# Altium PCB LPCB218R0.PcbDoc (part 1 of 3)
Units mm, origin at the board's own origin, x right, y up, seen from the top; angles counter-clockwise.
Board outline 259.35 x 183.7 mm, 4 copper layers (Top Layer, Internal Plane 1, Mid-Layer 1, Bottom Layer); 193 components, 208 nets, 896 pads, 205 vias.
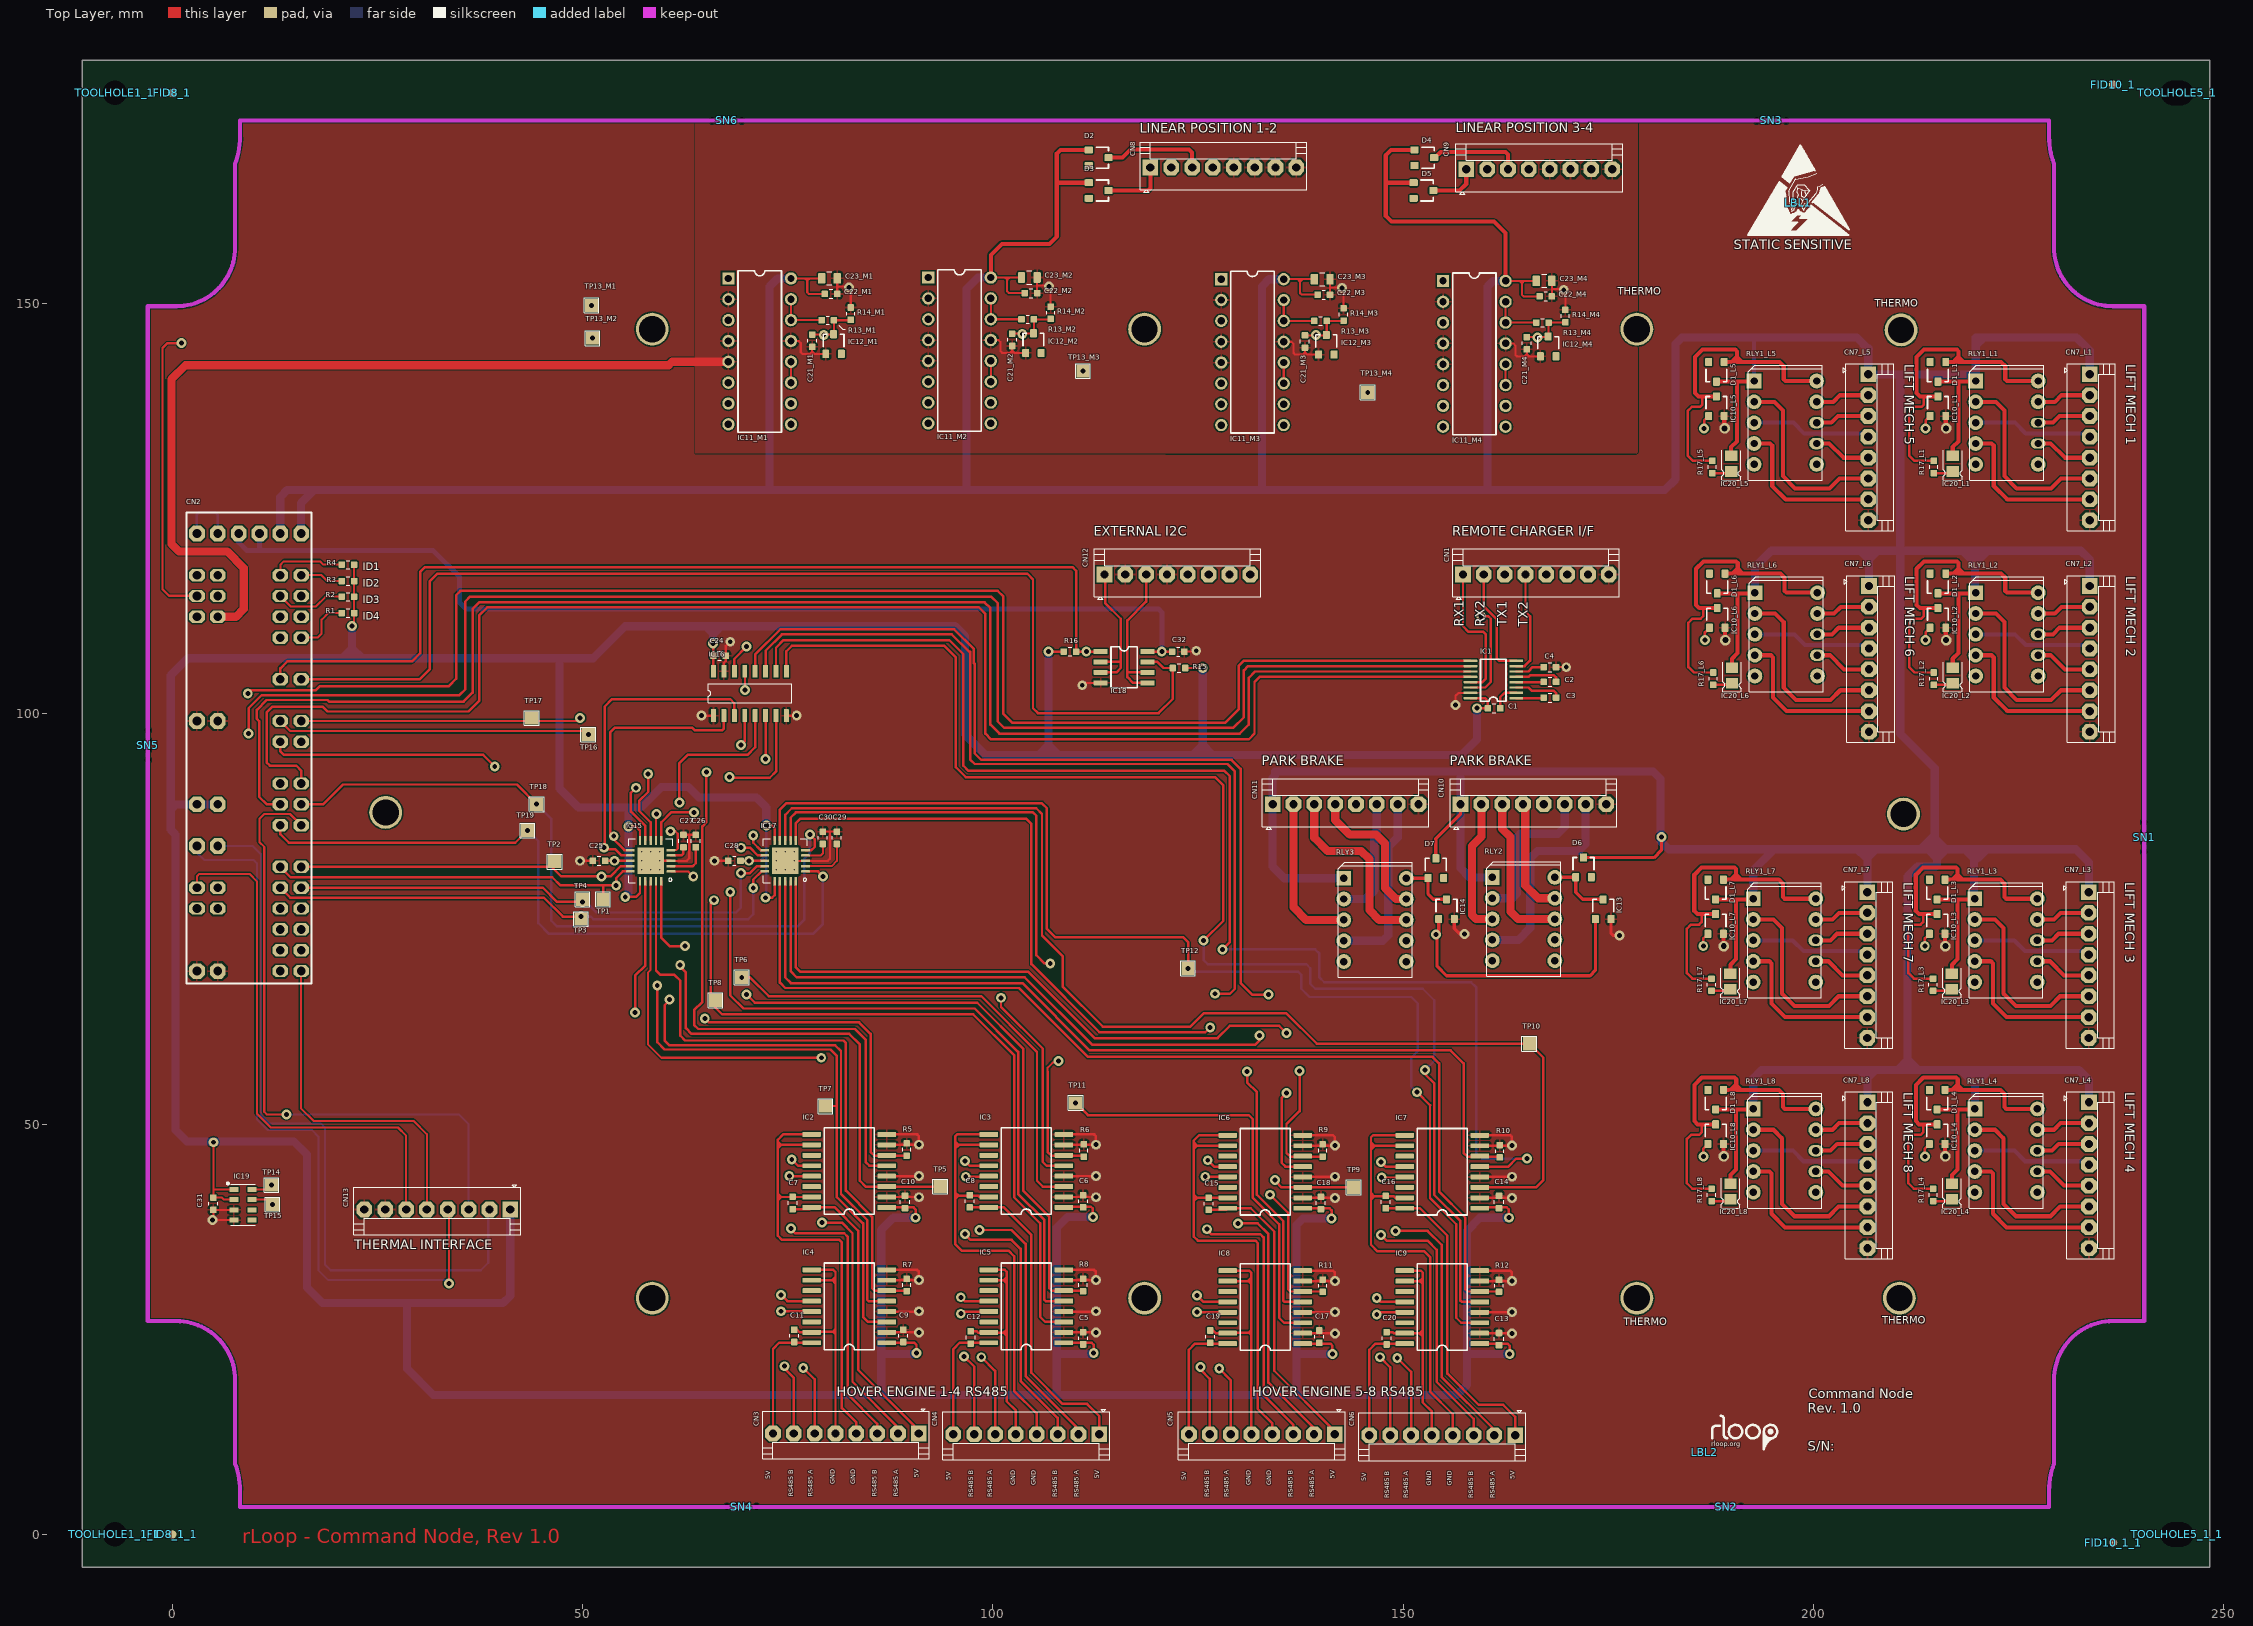
[diagram p0: Top Layer view]
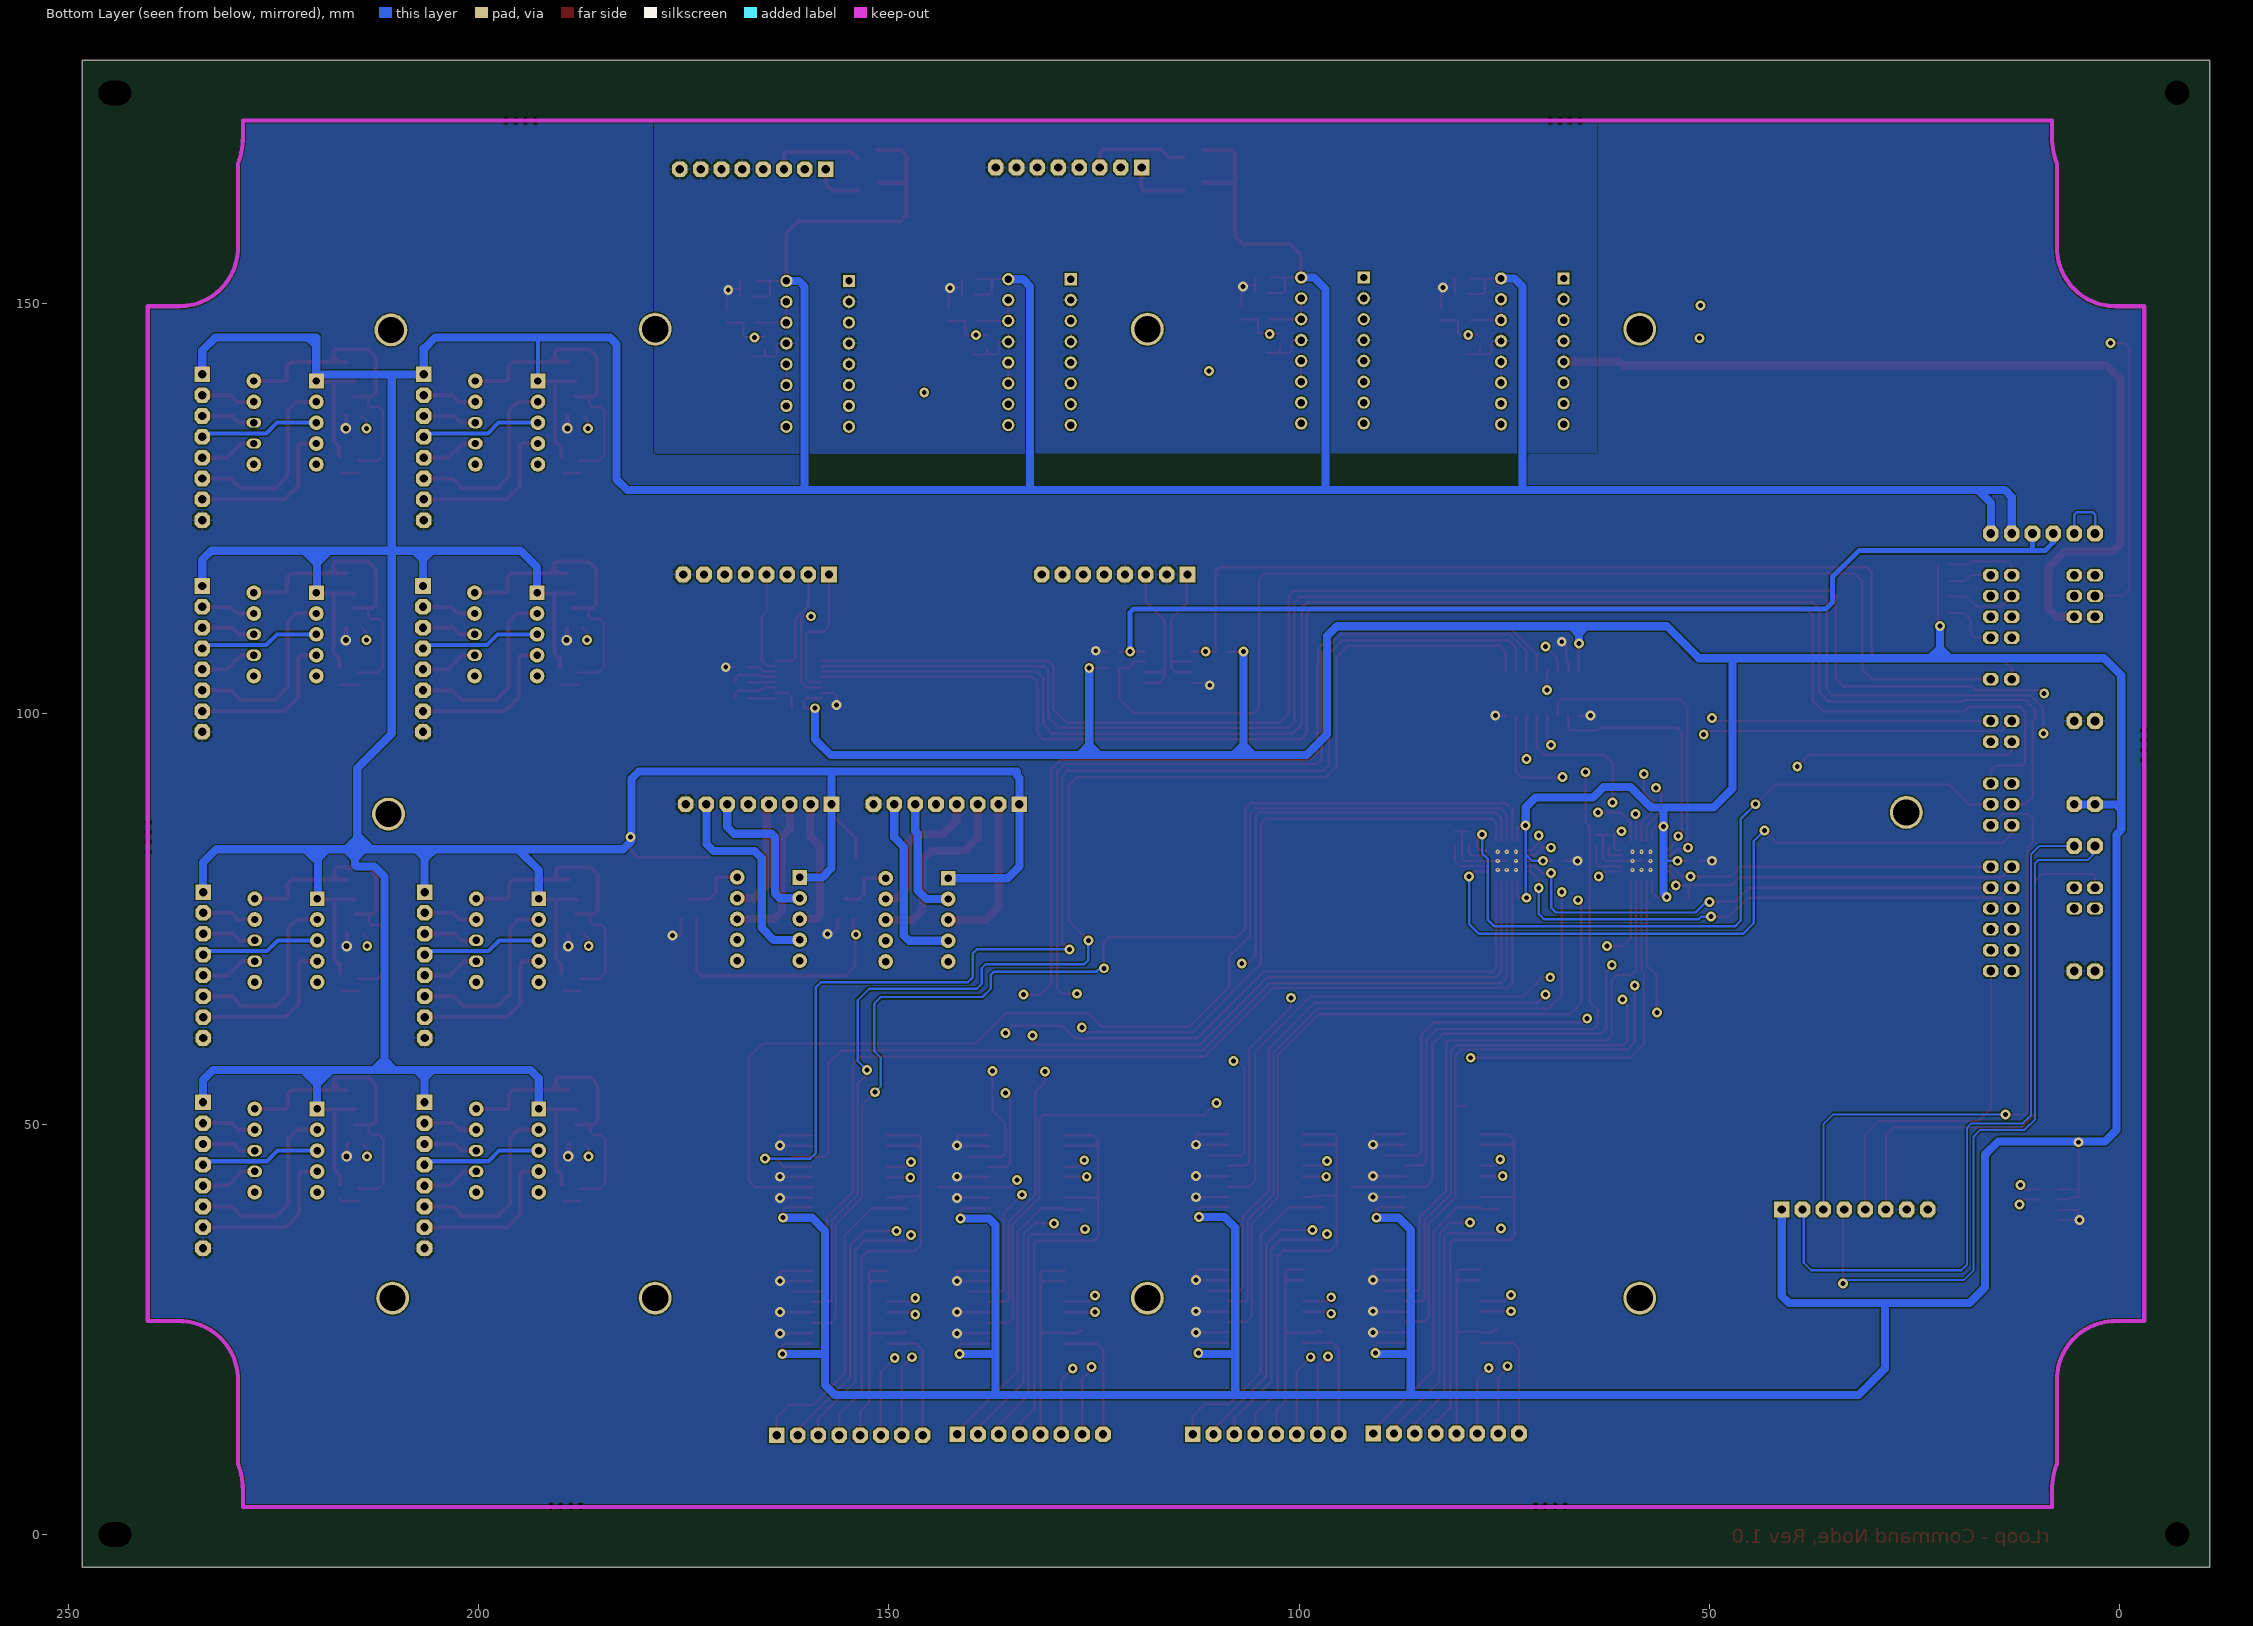
[diagram p1: Bottom Layer view, seen from below]
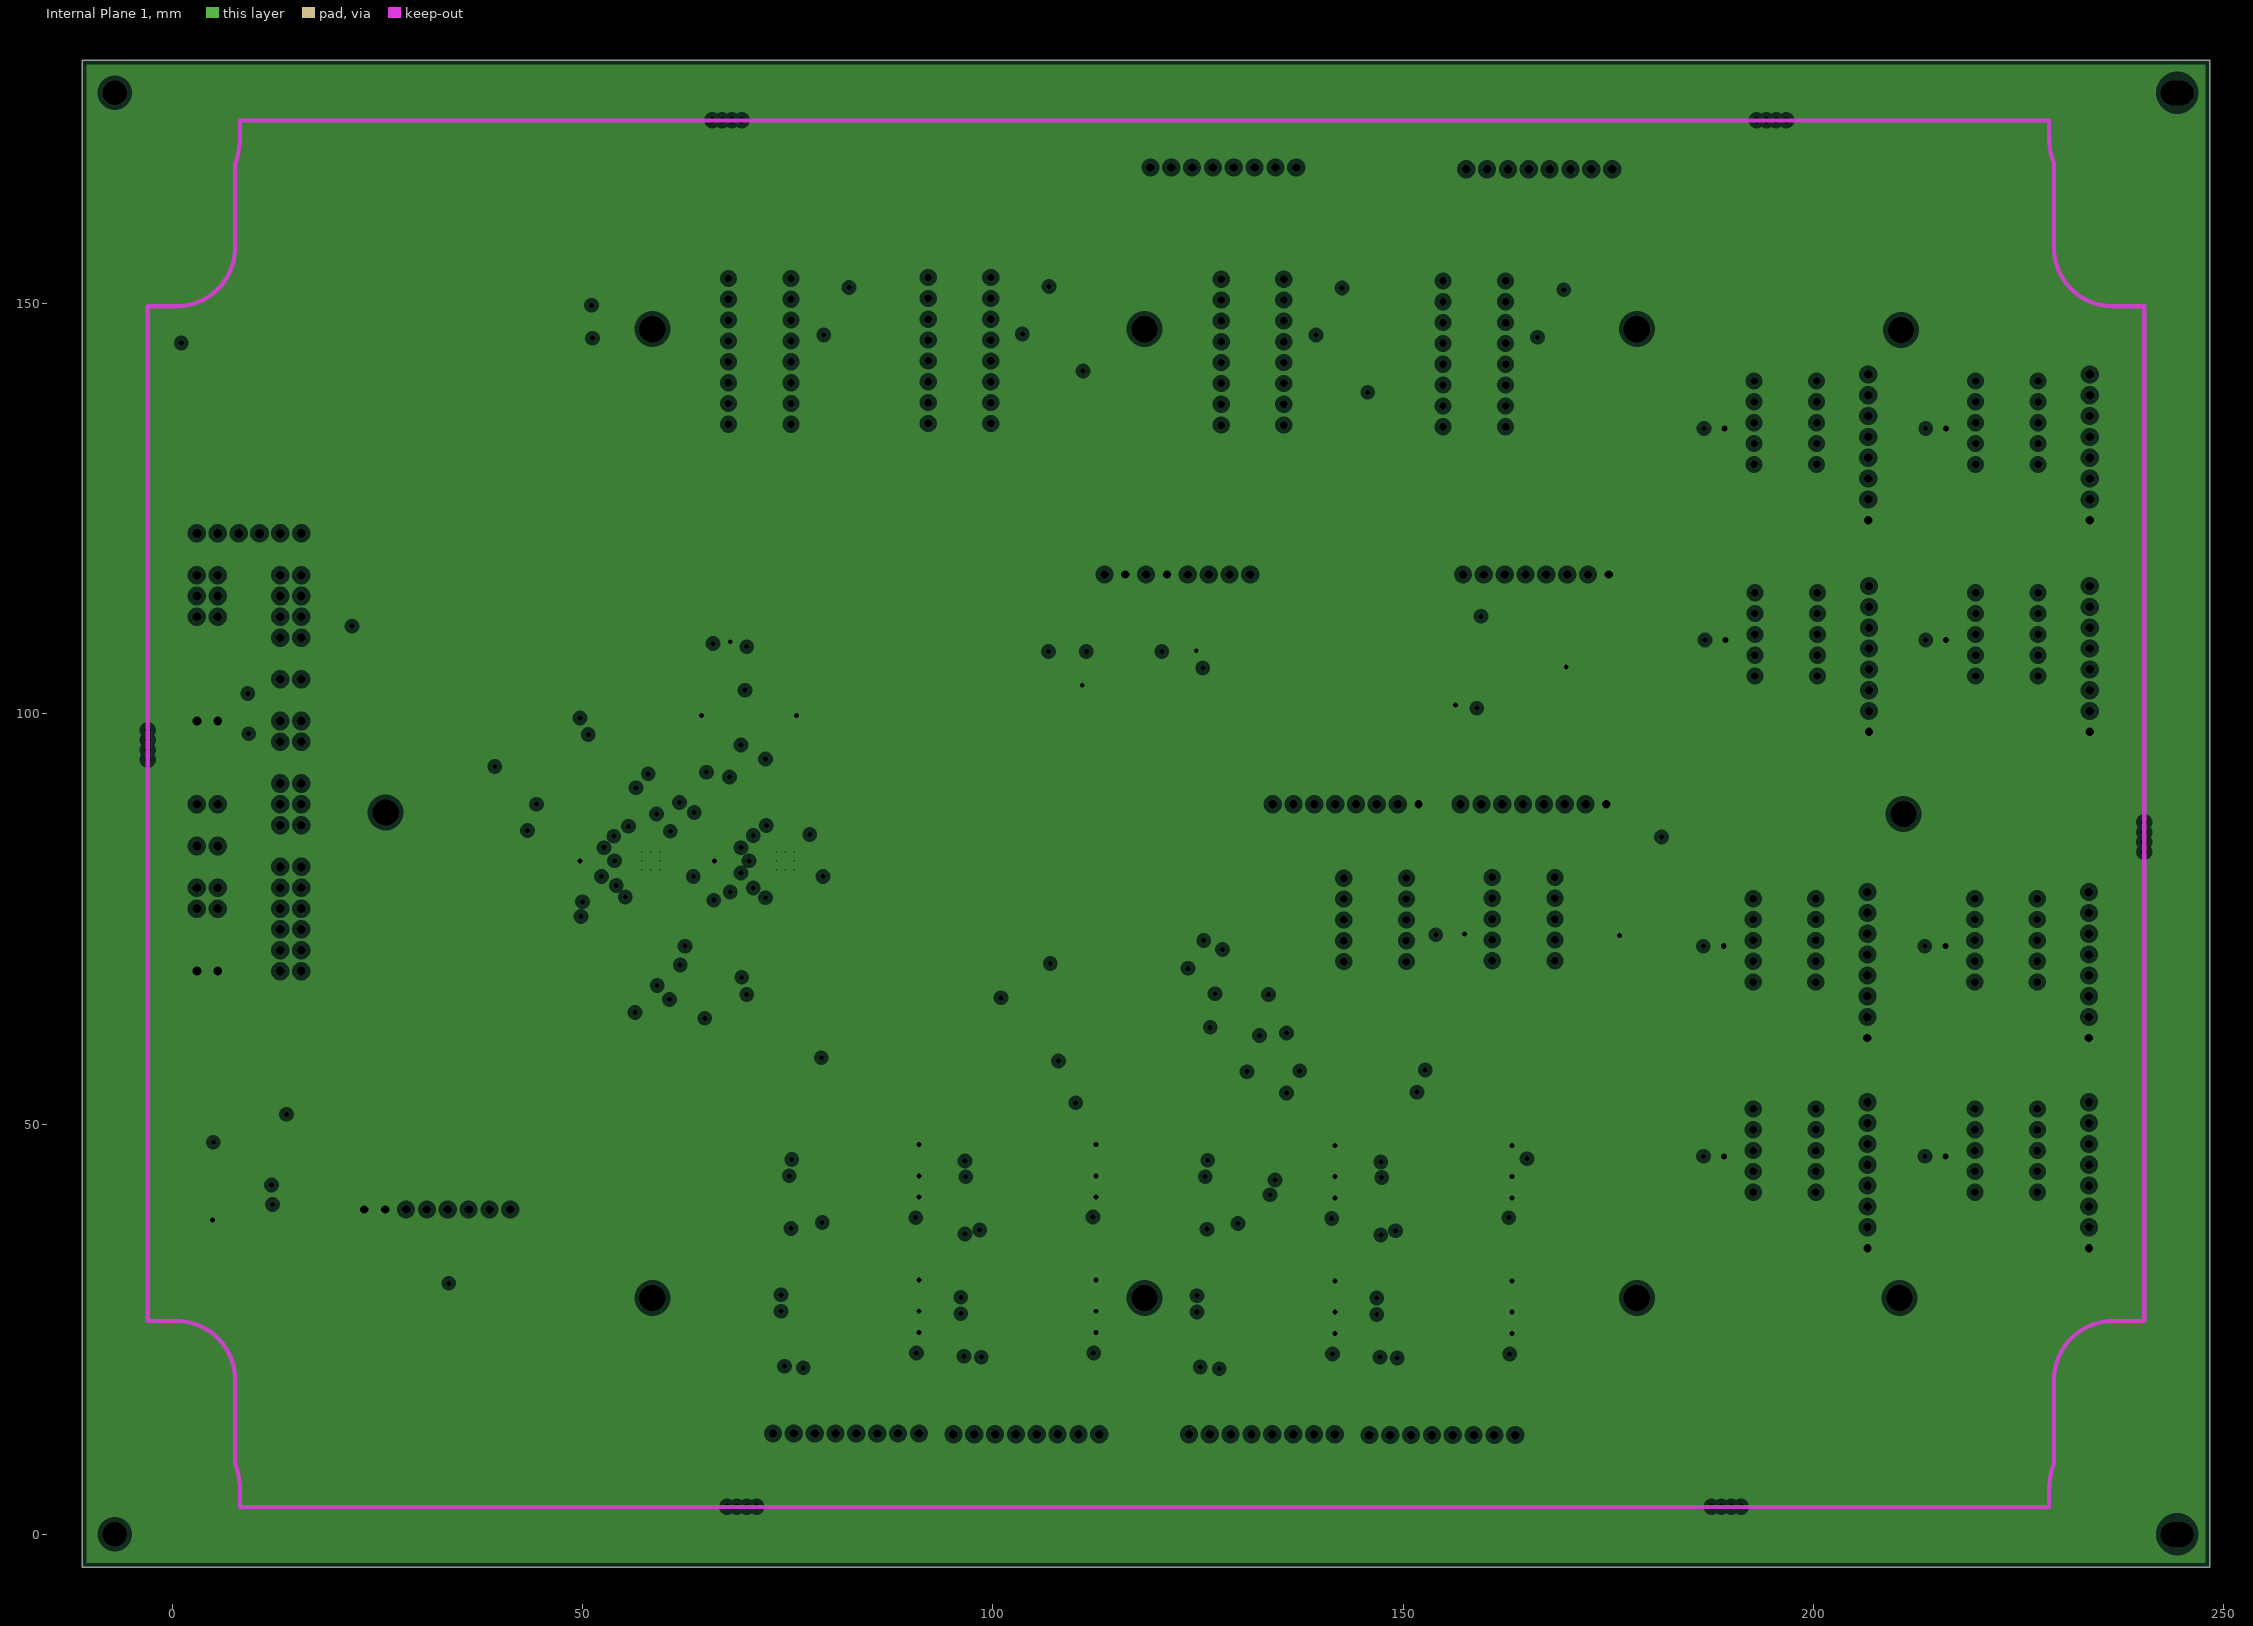
[diagram p2: Internal Plane 1, clearances drawn from the general rule]
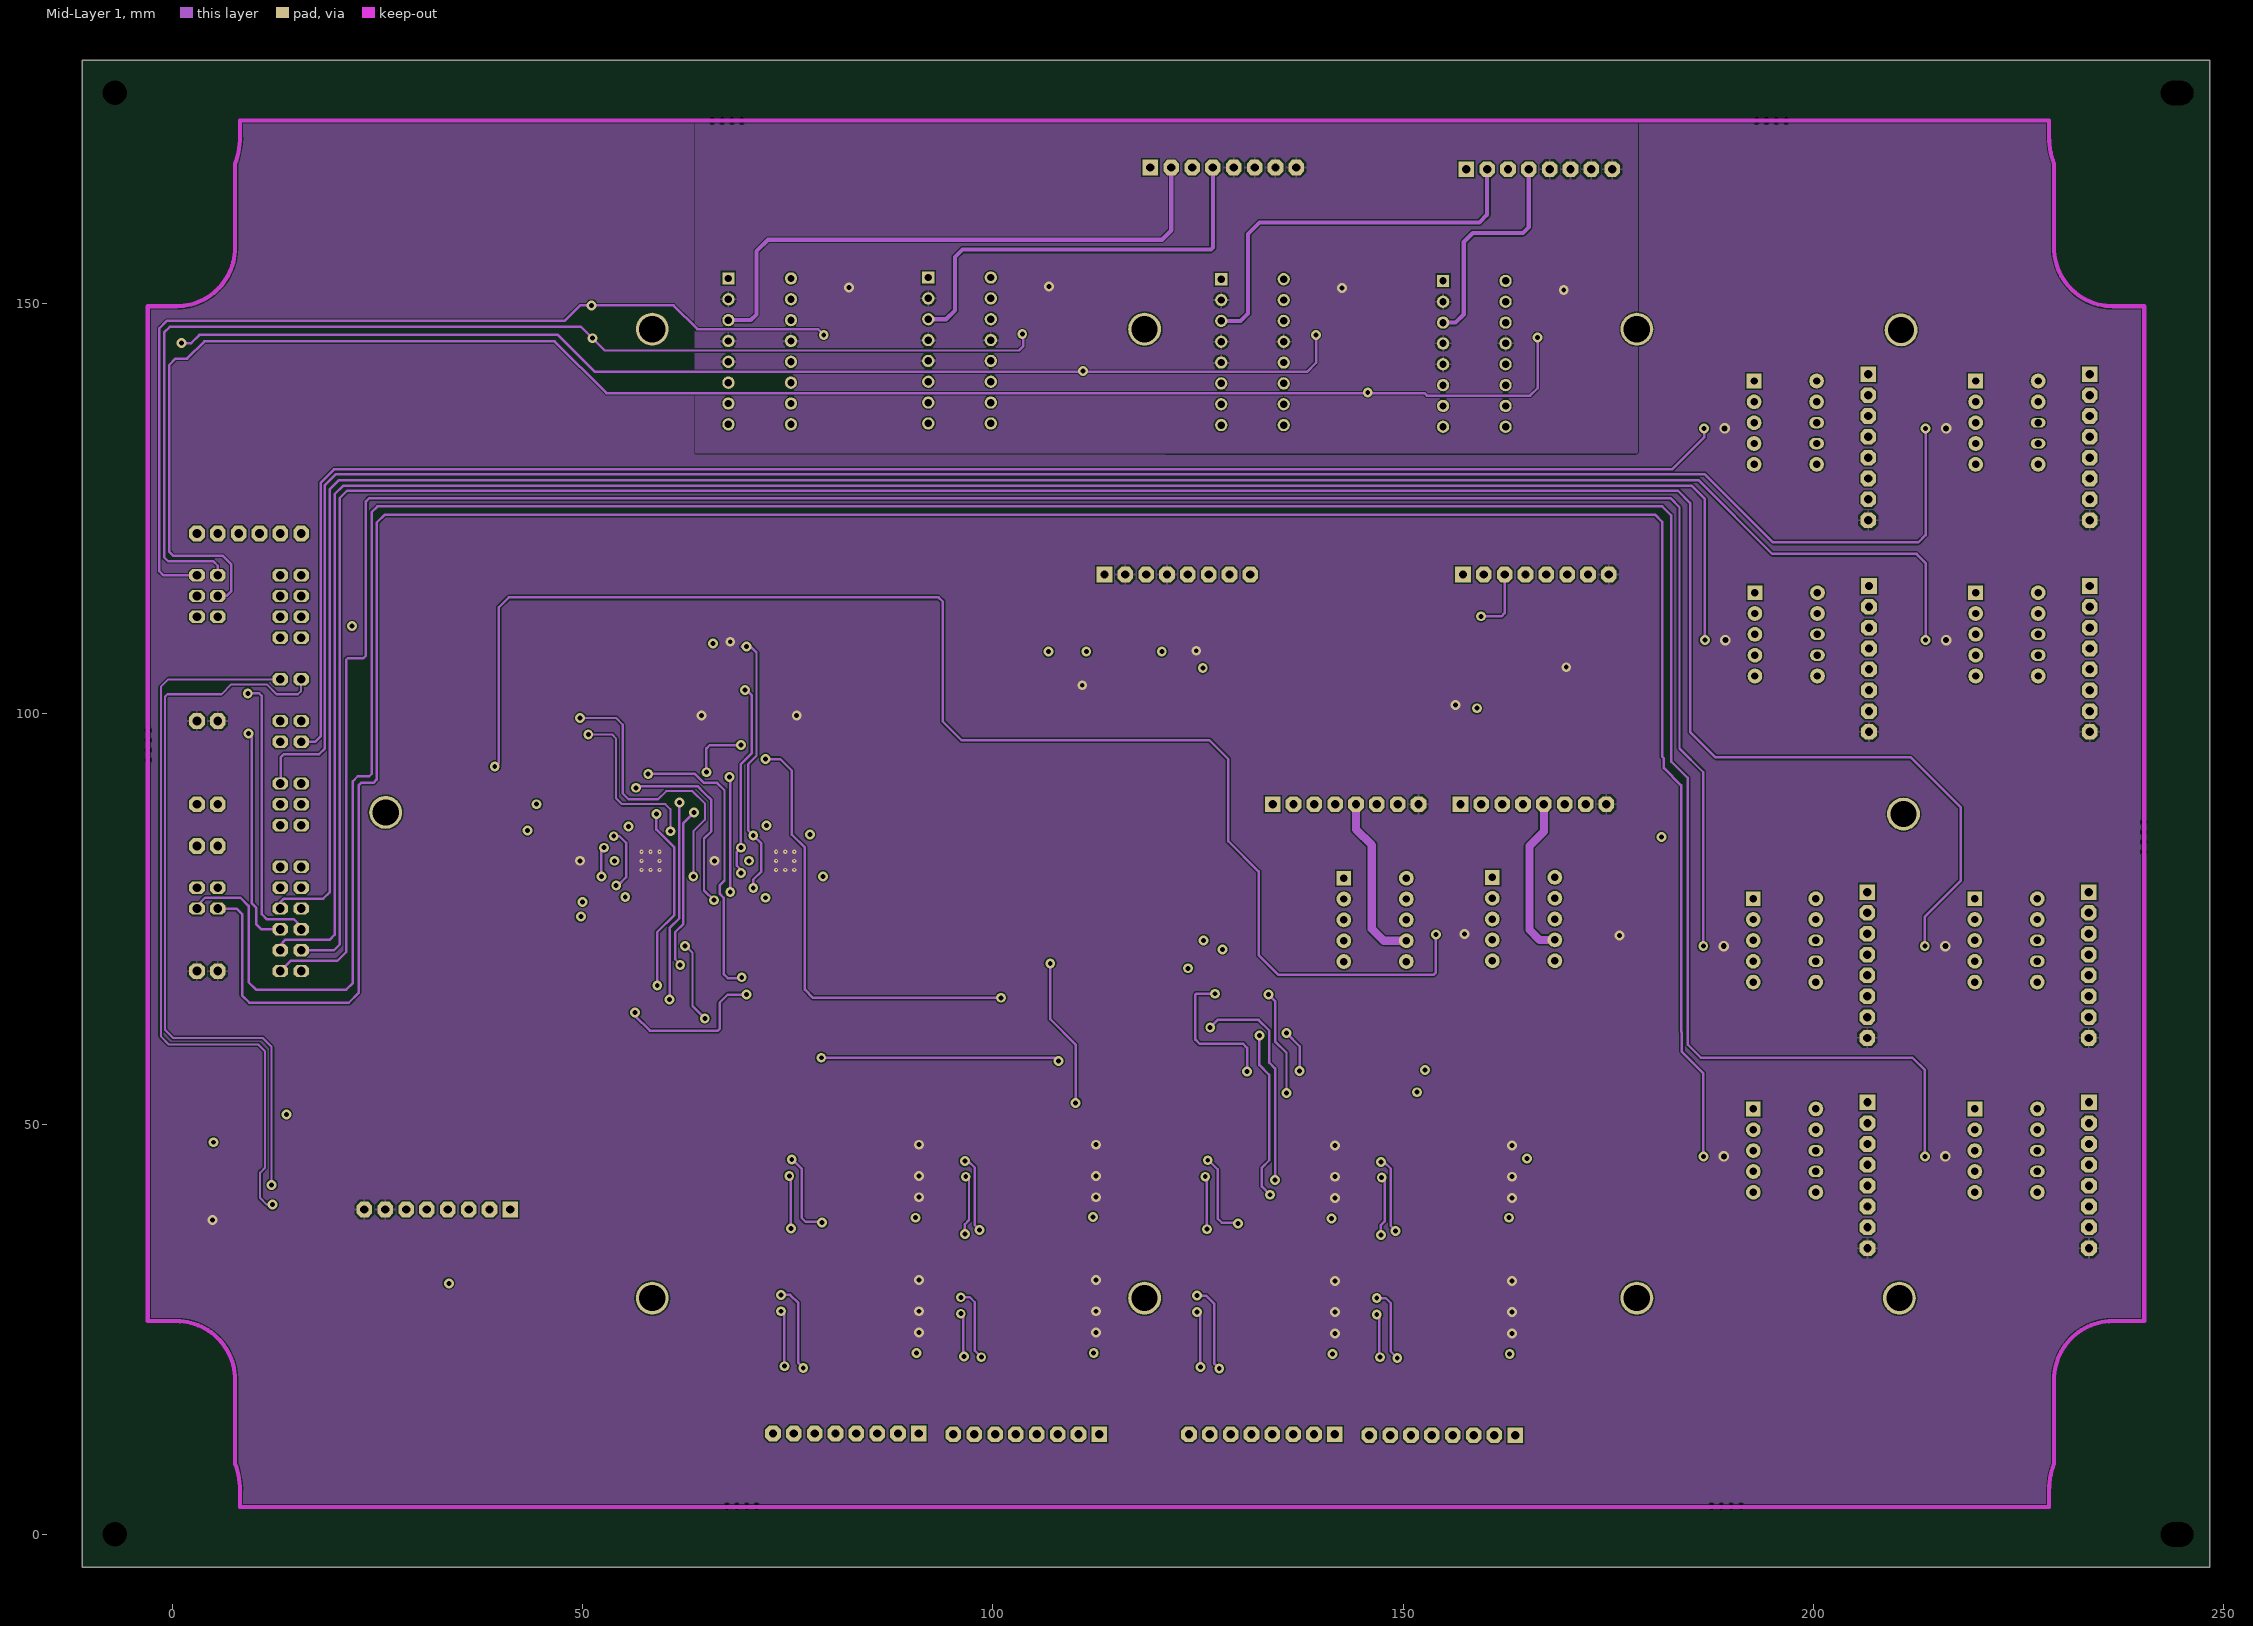
[diagram p3: Mid-Layer 1]

## Layer stack, top to bottom
Top Layer: signal copper 0.0356
Dielectric: core 0.32, FR-4, Dk 4.8
Internal Plane 1: plane copper 0.0356, net DGND
Dielectric: prepreg 0.32, FR-4, Dk 4.8
Mid-Layer 1: signal copper 0.0356
Dielectric: core 0.32, FR-4, Dk 4.8
Bottom Layer: signal copper 0.0356

## Board outline
-11,-4 248.348,-4 248.348,179.695 -11,179.695

## Design rules (kind name [scope] priority, off if disabled: settings)
Clearance [All] p1: gap=0.16
HoleSize [All] p1: absolutevalues=TRUE maxlimit=5 minlimit=0.025 maxpercent=80.000 minpercent=20.000
MinimumSolderMaskSliver [All] p1 off: minsoldermaskwidth=0.1
PlaneClearance [All] p1: clearance=0.6
PlaneConnect [All] p1: planeconnectstyle=Relief reliefexpansion=0.508 reliefentries=4 reliefconductorwidth=0.254 reliefairgap=0.254
PolygonConnect [IsVia] p1: connectstyle=Direct reliefconductorwidth=0.254 reliefentries=4 polygonreliefangle="90 Angle" airgapwidth=0.254
PolygonConnect PolygonConnect_1 [All] p2: connectstyle=Relief reliefconductorwidth=0.254 reliefentries=4 polygonreliefangle="90 Angle" airgapwidth=0.254
RoomDefinition "LPCB218 - OVERVIEW" [InComponentClass('LPCB218 - OVERVIEW')] p1: confinementstyle=ConfineIn formatcopy=TRUE lockcomponents=FALSE outline -79.611,-108.179 -28.811,-108.179 -28.811,-82.779 -79.611,-82.779
RoomDefinition "U_LPCB218 - CORE INTERFACE" [InComponentClass('U_LPCB218 - CORE INTERFACE')] p2: confinementstyle=ConfineIn formatcopy=TRUE lockcomponents=FALSE outline 1,57.6 33.7,57.6 33.7,118.1 1,118.1
RoomDefinition "U_LPCB218 - RS485 MUX CONTROL" [InComponentClass('U_LPCB218 - RS485 MUX CONTROL')] p3: confinementstyle=ConfineIn formatcopy=TRUE lockcomponents=FALSE outline -79.611,-108.179 -28.811,-108.179 -28.811,-82.779 -79.611,-82.779
RoomDefinition "U_LPCB218 - INTERNAL PRESSURE" [InComponentClass('U_LPCB218 - INTERNAL PRESSURE')] p4: confinementstyle=ConfineIn formatcopy=TRUE lockcomponents=FALSE outline 1,36.975 12.3,36.975 12.3,45.975 1,45.975
RoomDefinition "U_LPCB218 - EXTERNAL I2C" [InComponentClass('U_LPCB218 - EXTERNAL I2C')] p5: confinementstyle=ConfineIn formatcopy=TRUE lockcomponents=FALSE outline 101.295,96.25 133.195,96.25 133.195,119.65 101.295,119.65
RoomDefinition L8 [InComponentClass('L8')] p6: confinementstyle=ConfineIn formatcopy=TRUE lockcomponents=FALSE outline 183.91,32.48 210.91,32.48 210.91,57.88 183.91,57.88
RoomDefinition L7 [InComponentClass('L7')] p7: confinementstyle=ConfineIn formatcopy=TRUE lockcomponents=FALSE outline 183.9,58.1 210.9,58.1 210.9,83.5 183.9,83.5
RoomDefinition L6 [InComponentClass('L6')] p8: confinementstyle=ConfineIn formatcopy=TRUE lockcomponents=FALSE outline 184.1,95.4 211.1,95.4 211.1,120.8 184.1,120.8
RoomDefinition L5 [InComponentClass('L5')] p9: confinementstyle=ConfineIn formatcopy=TRUE lockcomponents=FALSE outline 184,121.2 211,121.2 211,146.6 184,146.6
RoomDefinition L4 [InComponentClass('L4')] p10: confinementstyle=ConfineIn formatcopy=TRUE lockcomponents=FALSE outline 210.91,32.48 237.91,32.48 237.91,57.88 210.91,57.88
RoomDefinition L3 [InComponentClass('L3')] p11: confinementstyle=ConfineIn formatcopy=TRUE lockcomponents=FALSE outline 210.9,58.1 237.9,58.1 237.9,83.5 210.9,83.5
RoomDefinition L2 [InComponentClass('L2')] p12: confinementstyle=ConfineIn formatcopy=TRUE lockcomponents=FALSE outline 211,95.4 238,95.4 238,120.8 211,120.8
RoomDefinition L1 [InComponentClass('L1')] p13: confinementstyle=ConfineIn formatcopy=TRUE lockcomponents=FALSE outline 211,121.2 238,121.2 238,146.6 211,146.6
RoomDefinition M4 [InComponentClass('M4')] p14: confinementstyle=ConfineIn formatcopy=TRUE lockcomponents=FALSE outline 150.09,129.79 177.64,129.79 177.64,155.19 150.09,155.19
RoomDefinition M3 [InComponentClass('M3')] p15: confinementstyle=ConfineIn formatcopy=TRUE lockcomponents=FALSE outline 123.05,130 150.6,130 150.6,155.4 123.05,155.4
RoomDefinition M2 [InComponentClass('M2')] p16: confinementstyle=ConfineIn formatcopy=TRUE lockcomponents=FALSE outline 87.35,130.2 114.9,130.2 114.9,155.6 87.35,155.6
RoomDefinition M1 [InComponentClass('M1')] p17: confinementstyle=ConfineIn formatcopy=TRUE lockcomponents=FALSE outline 62.99,130.09 87.44,130.09 87.44,155.49 62.99,155.49
RoomDefinition "U_LPCB218 - PARK BRAKE" [InComponentClass('U_LPCB218 - PARK BRAKE')] p18: confinementstyle=ConfineIn formatcopy=TRUE lockcomponents=FALSE outline 112.4,64.4 177.3,64.4 177.3,92.4 112.4,92.4
RoomDefinition "U_LPCB218 - MLP INTERFACE" [InComponentClass('U_LPCB218 - MLP INTERFACE')] p19: confinementstyle=ConfineIn formatcopy=TRUE lockcomponents=FALSE outline 63.1,156.89 177.7,156.89 177.7,170.8 63.1,170.8
RoomDefinition "U_LPCB218 - HEC5-8" [InComponentClass('U_LPCB218 - HEC5-8')] p20: confinementstyle=ConfineIn formatcopy=TRUE lockcomponents=FALSE outline 121.6,4 165.3,4 165.3,56.7 121.6,56.7
RoomDefinition "U_LPCB218 - HEC1-4" [InComponentClass('U_LPCB218 - HEC1-4')] p21: confinementstyle=ConfineIn formatcopy=TRUE lockcomponents=FALSE outline 70.9,4.1 114.6,4.1 114.6,56.8 70.9,56.8
RoomDefinition "U_LPCB218 - CHARGER INTERFACE" [InComponentClass('U_LPCB218 - CHARGER INTERFACE')] p22: confinementstyle=ConfineIn formatcopy=TRUE lockcomponents=FALSE outline 177.1,120.35 145.7,120.35 145.7,97.05 177.1,97.05
RoutingVias [All] p1: holewidth=0.6 width=1.2 viastyle="Through Hole" minholewidth=0.6 minwidth=1.2 maxholewidth=1 maxwidth=3
SilkToSilkClearance [All] p1 off: silktosilkclearance=0.254
SilkToSolderMaskClearance [IsPad] p1 off: minsilkscreentomaskgap=0.254 clearancetoexposedcopper=TRUE
SolderMaskExpansion [All] p1: expansion=0.102
Width [All] p1: maxlimit=2 minlimit=0.254 preferedwidth=0.254
22 further rules are at their usual default settings.

## Classes and differential pairs
component class "U_LPCB218 - INTERNAL PRESSURE": C31 IC19 TP14 TP15
component class "U_LPCB218 - EXTERNAL I2C": C32 CN12 IC18 R15 R16
component class L1: CN7_L1 D1_L1 IC10_L1 IC20_L1 R17_L1 RLY1_L1
component class L2: CN7_L2 D1_L2 IC10_L2 IC20_L2 R17_L2 RLY1_L2
component class L3: CN7_L3 D1_L3 IC10_L3 IC20_L3 R17_L3 RLY1_L3
component class L4: CN7_L4 D1_L4 IC10_L4 IC20_L4 R17_L4 RLY1_L4
component class L5: CN7_L5 D1_L5 IC10_L5 IC20_L5 R17_L5 RLY1_L5
component class L6: CN7_L6 D1_L6 IC10_L6 IC20_L6 R17_L6 RLY1_L6
component class L7: CN7_L7 D1_L7 IC10_L7 IC20_L7 R17_L7 RLY1_L7
component class L8: CN7_L8 D1_L8 IC10_L8 IC20_L8 R17_L8 RLY1_L8
component class "U_LPCB218 - CHARGER INTERFACE": C1 C2 C3 C4 CN1 IC1
component class "U_LPCB218 - CORE INTERFACE": CN2 CN13 R1 R2 R3 R4
component class "U_LPCB218 - HEC1-4": C5 C6 C7 C8 C9 C10 C11 C12 CN3 CN4 IC2 IC3 IC4 IC5 R5 R6 R7 R8 TP5 TP6 TP7 TP8
component class "U_LPCB218 - HEC5-8": C13 C14 C15 C16 C17 C18 C19 C20 CN5 CN6 IC6 IC7 IC8 IC9 R9 R10 R11 R12 TP9 TP10 TP11 TP12
component class "U_LPCB218 - MLP INTERFACE": CN8 CN9 D2 D3 D4 D5
component class "U_LPCB218 - PARK BRAKE": CN10 CN11 D6 D7 IC13 IC14 RLY2 RLY3
component class "U_LPCB218 - RS485 MUX CONTROL": C24 C25 C26 C27 C28 C29 C30 IC15 IC16 IC17 TP1 TP2 TP3 TP4 TP16 TP17 TP18 TP19
net class LIFT_UP[1..8]: LIFT_UP1 LIFT_UP2 LIFT_UP3 LIFT_UP4 LIFT_UP5 LIFT_UP6 LIFT_UP7 LIFT_UP8
net class MA420IN[1..4]: MA420IN1 MA420IN2 MA420IN3 MA420IN4
net class MLP_OUT[1..4]: MLP_OUT1 MLP_OUT2 MLP_OUT3 MLP_OUT4
channel class "LPCB218 - LIFT MECH RELAY": LIFT1 LIFT2 LIFT3 LIFT4 LIFT5 LIFT6 LIFT7 LIFT8
component class M1: C21_M1 C22_M1 C23_M1 IC11_M1 IC12_M1 R13_M1 R14_M1 TP13_M1
component class M2: C21_M2 C22_M2 C23_M2 IC11_M2 IC12_M2 R13_M2 R14_M2 TP13_M2
component class M3: C21_M3 C22_M3 C23_M3 IC11_M3 IC12_M3 R13_M3 R14_M3 TP13_M3
component class M4: C21_M4 C22_M4 C23_M4 IC11_M4 IC12_M4 R13_M4 R14_M4 TP13_M4
channel class "LPCB218 - MLP CHANNEL": MLP1 MLP2 MLP3 MLP4
component class "LPCB218 - OVERVIEW": LBL1 LBL2 SN1 SN2 SN3 SN4 SN5 SN6

## Components (designator, comment, footprint, x,y, rotation, side; value= is the part's Value field where it differs from the comment)
C1 "100n / 50V / 10% / SMD 0603" LFP011__CC1608-0603-IPC7351_B 161.1,100.7 r0 top
C2 "100n / 50V / 10% / SMD 0603" LFP011__CC1608-0603-IPC7351_B 167.9,103.9 r0 top
C3 "100n / 50V / 10% / SMD 0603" LFP011__CC1608-0603-IPC7351_B 167.9,102 r0 top
C4 "100n / 50V / 10% / SMD 0603" LFP011__CC1608-0603-IPC7351_B 167.9,105.7 r0 top
C5 "100n / 50V / 10% / SMD 0603" LFP011__CC1608-0603-IPC7351_B 111,23.9 r90 top
C6 "100n / 50V / 10% / SMD 0603" LFP011__CC1608-0603-IPC7351_B 111,40.6 r90 top
C7 "100n / 50V / 10% / SMD 0603" LFP011__CC1608-0603-IPC7351_B 75.6,40.4 r90 top
C8 "100n / 50V / 10% / SMD 0603" LFP011__CC1608-0603-IPC7351_B 97.2,40.6 r90 top
C9 "100n / 50V / 10% / SMD 0603" LFP011__CC1608-0603-IPC7351_B 89.1,24.2 r90 top
C10 "100n / 50V / 10% / SMD 0603" LFP011__CC1608-0603-IPC7351_B 89.3,40.5 r90 top
C11 "100n / 50V / 10% / SMD 0603" LFP011__CC1608-0603-IPC7351_B 75.8,24.2 r90 top
C12 "100n / 50V / 10% / SMD 0603" LFP011__CC1608-0603-IPC7351_B 97.3,24 r90 top
C13 "100n / 50V / 10% / SMD 0603" LFP011__CC1608-0603-IPC7351_B 161.7,23.8 r90 top
C14 "100n / 50V / 10% / SMD 0603" LFP011__CC1608-0603-IPC7351_B 161.7,40.5 r90 top
C15 "100n / 50V / 10% / SMD 0603" LFP011__CC1608-0603-IPC7351_B 126.3,40.3 r90 top
C16 "100n / 50V / 10% / SMD 0603" LFP011__CC1608-0603-IPC7351_B 147.9,40.5 r90 top
C17 "100n / 50V / 10% / SMD 0603" LFP011__CC1608-0603-IPC7351_B 139.8,24.1 r90 top
C18 "100n / 50V / 10% / SMD 0603" LFP011__CC1608-0603-IPC7351_B 140,40.4 r90 top
C19 "100n / 50V / 10% / SMD 0603" LFP011__CC1608-0603-IPC7351_B 126.5,24.1 r90 top
C20 "100n / 50V / 10% / SMD 0603" LFP011__CC1608-0603-IPC7351_B 148,23.9 r90 top
C21_M1 "10pF / 50V / 5% / SMD 0603" LFP011__CC1608-0603-IPC7351_B 77.99,145.49 r270 top (schematic designator C21)
C21_M2 "10pF / 50V / 5% / SMD 0603" LFP011__CC1608-0603-IPC7351_B 102.35,145.6 r270 top (schematic designator C21)
C21_M3 "10pF / 50V / 5% / SMD 0603" LFP011__CC1608-0603-IPC7351_B 138.05,145.4 r270 top (schematic designator C21)
C21_M4 "10pF / 50V / 5% / SMD 0603" LFP011__CC1608-0603-IPC7351_B 165.09,145.19 r270 top (schematic designator C21)
C22_M1 "100n / 50V / 10% / SMD 0603" LFP011__CC1608-0603-IPC7351_B 80.29,151.19 r0 top (schematic designator C22)
C22_M2 "100n / 50V / 10% / SMD 0603" LFP011__CC1608-0603-IPC7351_B 104.65,151.3 r0 top (schematic designator C22)
C22_M3 "100n / 50V / 10% / SMD 0603" LFP011__CC1608-0603-IPC7351_B 140.35,151.1 r0 top (schematic designator C22)
C22_M4 "100n / 50V / 10% / SMD 0603" LFP011__CC1608-0603-IPC7351_B 167.39,150.89 r0 top (schematic designator C22)
C23_M1 "1uF / 50V / 10% / SMD 0805" LFP010__CC2012-0805-IPC7351_B 80.09,153.09 r0 top (schematic designator C23)
C23_M2 "1uF / 50V / 10% / SMD 0805" LFP010__CC2012-0805-IPC7351_B 104.45,153.2 r0 top (schematic designator C23)
C23_M3 "1uF / 50V / 10% / SMD 0805" LFP010__CC2012-0805-IPC7351_B 140.15,153 r0 top (schematic designator C23)
C23_M4 "1uF / 50V / 10% / SMD 0805" LFP010__CC2012-0805-IPC7351_B 167.19,152.79 r0 top (schematic designator C23)
C24 "100n / 50V / 10% / SMD 0603" LFP011__CC1608-0603-IPC7351_B 66.7,107.1 r0 top
C25 "100n / 50V / 10% / SMD 0603" LFP011__CC1608-0603-IPC7351_B 52,82.1 r180 top
C26 "100n / 50V / 10% / SMD 0603" LFP011__CC1608-0603-IPC7351_B 63.8,84.5 r90 top
C27 "100n / 50V / 10% / SMD 0603" LFP011__CC1608-0603-IPC7351_B 62.3,84.5 r90 top
C28 "100n / 50V / 10% / SMD 0603" LFP011__CC1608-0603-IPC7351_B 68.5,82.1 r180 top
C29 "100n / 50V / 10% / SMD 0603" LFP011__CC1608-0603-IPC7351_B 81,84.9 r90 top
C30 "100n / 50V / 10% / SMD 0603" LFP011__CC1608-0603-IPC7351_B 79.3,84.9 r90 top
C31 "100n / 50V / 10% / SMD 0603" LFP011__CC1608-0603-IPC7351_B 5,40.3 r270 top
C32 "100n / 50V / 10% / SMD 0603" LFP011__CC1608-0603-IPC7351_B 122.6,107.6 r0 top
CN1 "640456-8" 640456-8 166.2,117 r0 top
CN2 "RLOOP_NODE_CORE" RLOOP_NODE_CORE 3,122 r270 top locked
CN3 "640456-8" 640456-8 82.1,12.3 r180 top
CN4 "640456-8" 640456-8 104.09,12.2 r180 top
CN5 "640456-8" 640456-8 132.8,12.2 r180 top
CN6 "640456-8" 640456-8 154.79,12.1 r180 top
CN7_L1 "640456-8" 640456-8 233.7,132.5 r270 top (schematic designator CN7)
CN7_L2 "640456-8" 640456-8 233.7,106.7 r270 top (schematic designator CN7)
CN7_L3 "640456-8" 640456-8 233.6,69.4 r270 top (schematic designator CN7)
CN7_L4 "640456-8" 640456-8 233.61,43.78 r270 top (schematic designator CN7)
CN7_L5 "640456-8" 640456-8 206.7,132.5 r270 top (schematic designator CN7)
CN7_L6 "640456-8" 640456-8 206.8,106.7 r270 top (schematic designator CN7)
CN7_L7 "640456-8" 640456-8 206.6,69.4 r270 top (schematic designator CN7)
CN7_L8 "640456-8" 640456-8 206.61,43.78 r270 top (schematic designator CN7)
CN8 "640456-8" 640456-8 128.1,166.6 r0 top
CN9 "640456-8" 640456-8 166.6,166.4 r0 top
CN10 "640456-8" 640456-8 165.9,89 r0 top
CN11 "640456-8" 640456-8 143,89 r0 top
CN12 "640456-8" 640456-8 122.5,117 r0 top
CN13 "640456-8" 640456-8 32.3,39.6 r180 top
D1_L1 "BAS16" LFP021__SOT23 215.2,141.7 r180 top (schematic designator D1)
D1_L2 "BAS16" LFP021__SOT23 215.2,115.9 r180 top (schematic designator D1)
D1_L3 "BAS16" LFP021__SOT23 215.1,78.6 r180 top (schematic designator D1)
D1_L4 "BAS16" LFP021__SOT23 215.11,52.98 r180 top (schematic designator D1)
D1_L5 "BAS16" LFP021__SOT23 188.2,141.7 r180 top (schematic designator D1)
D1_L6 "BAS16" LFP021__SOT23 188.3,115.9 r180 top (schematic designator D1)
D1_L7 "BAS16" LFP021__SOT23 188.1,78.6 r180 top (schematic designator D1)
D1_L8 "BAS16" LFP021__SOT23 188.11,52.98 r180 top (schematic designator D1)
D2 "BAS16" LFP021__SOT23 112.9,167.8 r270 top
D3 "BAS16" LFP021__SOT23 112.9,163.8 r270 top
D4 "BAS16" LFP021__SOT23 152.6,167.8 r270 top
D5 "BAS16" LFP021__SOT23 152.5,163.8 r270 top
D6 "BAS16" LFP021__SOT23 172,81.3 r0 top
D7 "BAS16" LFP021__SOT23 154,81.2 r0 top
FID8_1 "FIDUCIAL" FIDTOP 0,175.695 r0 top
FID8_1_1 "FIDUCIAL" FIDTOP 0,0 r0 top
FID10_1 "FIDUCIAL" FIDTOP 236.548,176.695 r0 top
FID10_1_1 "FIDUCIAL" FIDTOP 236.548,-1 r0 top
IC1 "MAX3232CPWR" LFP049__TSSOP-16 161,104.2 r90 top
IC2 "ISO3082DWR" LFP068__SO-G16/G6.9 82.5,44.3 r90 top
IC3 "ISO3082DWR" LFP068__SO-G16/G6.9 104.09,44.3 r90 top
IC4 "ISO3082DWR" LFP068__SO-G16/G6.9 82.5,27.8 r90 top
IC5 "ISO3082DWR" LFP068__SO-G16/G6.9 104.09,27.8 r90 top
IC6 "ISO3082DWR" LFP068__SO-G16/G6.9 133.2,44.2 r90 top
IC7 "ISO3082DWR" LFP068__SO-G16/G6.9 154.79,44.2 r90 top
IC8 "ISO3082DWR" LFP068__SO-G16/G6.9 133.2,27.7 r90 top
IC9 "ISO3082DWR" LFP068__SO-G16/G6.9 154.79,27.7 r90 top
IC10_L1 "NUD3124LT1G" LFP021__SOT23 215.2,137.5 r0 top (schematic designator IC10)
IC10_L2 "NUD3124LT1G" LFP021__SOT23 215.2,111.7 r0 top (schematic designator IC10)
IC10_L3 "NUD3124LT1G" LFP021__SOT23 215.1,74.4 r0 top (schematic designator IC10)
IC10_L4 "NUD3124LT1G" LFP021__SOT23 215.11,48.78 r0 top (schematic designator IC10)
IC10_L5 "NUD3124LT1G" LFP021__SOT23 188.2,137.5 r0 top (schematic designator IC10)
IC10_L6 "NUD3124LT1G" LFP021__SOT23 188.3,111.7 r0 top (schematic designator IC10)
IC10_L7 "NUD3124LT1G" LFP021__SOT23 188.1,74.4 r0 top (schematic designator IC10)
IC10_L8 "NUD3124LT1G" LFP021__SOT23 188.11,48.78 r0 top (schematic designator IC10)
IC11_M1 "RCV420JP" DIP-P16/X1.5 71.59,144.19 r270 top (schematic designator IC11)
IC11_M2 "RCV420JP" DIP-P16/X1.5 95.95,144.3 r270 top (schematic designator IC11)
IC11_M3 "RCV420JP" DIP-P16/X1.5 131.65,144.1 r270 top (schematic designator IC11)
IC11_M4 "RCV420JP" DIP-P16/X1.5 158.69,143.89 r270 top (schematic designator IC11)
IC12_M1 "BZX84C3V6LT1G" LFP021__SOT23 80.59,145.09 r0 top (schematic designator IC12)
IC12_M2 "BZX84C3V6LT1G" LFP021__SOT23 104.95,145.2 r0 top (schematic designator IC12)
IC12_M3 "BZX84C3V6LT1G" LFP021__SOT23 140.65,145 r0 top (schematic designator IC12)
IC12_M4 "BZX84C3V6LT1G" LFP021__SOT23 167.69,144.79 r0 top (schematic designator IC12)
IC13 "NUD3124LT1G" LFP021__SOT23 174.4,76.2 r0 top
IC14 "NUD3124LT1G" LFP021__SOT23 155.3,76.2 r0 top
IC15 "MAX14778ETP+" LFP014__QFN65P500X500X80_HS-21N 58.3,82.1 r90 top locked
IC16 "SN74HCT139DE4" LFP079__SOP16 70.4,102.5 r0 top
IC17 "MAX14778ETP+" LFP014__QFN65P500X500X80_HS-21N 74.7,82.1 r90 top
IC18 "P82B96D" LFP097__SOIC150-8 116,105.7 r270 top
IC19 "MS5607-02BA03" LFP140__QFN8 8.6,40.175 r0 top
IC20_L1 "EL-17-21VGC/TR8" CR2012-0805-LED 217,130.5 r90 top (schematic designator IC20)
IC20_L2 "EL-17-21VGC/TR8" CR2012-0805-LED 217,104.7 r90 top (schematic designator IC20)
IC20_L3 "EL-17-21VGC/TR8" CR2012-0805-LED 216.9,67.4 r90 top (schematic designator IC20)
IC20_L4 "EL-17-21VGC/TR8" CR2012-0805-LED 216.91,41.78 r90 top (schematic designator IC20)
IC20_L5 "EL-17-21VGC/TR8" CR2012-0805-LED 190,130.5 r90 top (schematic designator IC20)
IC20_L6 "EL-17-21VGC/TR8" CR2012-0805-LED 190.1,104.7 r90 top (schematic designator IC20)
IC20_L7 "EL-17-21VGC/TR8" CR2012-0805-LED 189.9,67.4 r90 top (schematic designator IC20)
IC20_L8 "EL-17-21VGC/TR8" CR2012-0805-LED 189.91,41.78 r90 top (schematic designator IC20)
LBL1 "STATIC LABEL" STATIC_LABEL 198.2,162.3 r0 top
LBL2 "RLOOP_LOGO" RLOOP_LOGO 186.8,10 r0 top
R1 "0R / 0.1W / SMD 0603" LFP020__CR1608-0603-IPC7351_B 21.4,112.3 r0 top
R2 "0R / 0.1W / SMD 0603" LFP020__CR1608-0603-IPC7351_B 21.4,114.3 r0 top
R3 "0R / 0.1W / SMD 0603" LFP020__CR1608-0603-IPC7351_B 21.4,116.2 r0 top
R4 "0R / 0.1W / SMD 0603" LFP020__CR1608-0603-IPC7351_B 21.4,118.2 r0 top
R5 "10K / 0.1W / 1% / SMD 0603" LFP020__CR1608-0603-IPC7351_B 89.5,46.9 r270 top
R6 "10K / 0.1W / 1% / SMD 0603" LFP020__CR1608-0603-IPC7351_B 111.1,46.8 r270 top
R7 "10K / 0.1W / 1% / SMD 0603" LFP020__CR1608-0603-IPC7351_B 89.5,30.4 r270 top
R8 "10K / 0.1W / 1% / SMD 0603" LFP020__CR1608-0603-IPC7351_B 111,30.4 r270 top
R9 "10K / 0.1W / 1% / SMD 0603" LFP020__CR1608-0603-IPC7351_B 140.2,46.8 r270 top
R10 "10K / 0.1W / 1% / SMD 0603" LFP020__CR1608-0603-IPC7351_B 161.8,46.7 r270 top
R11 "10K / 0.1W / 1% / SMD 0603" LFP020__CR1608-0603-IPC7351_B 140.2,30.3 r270 top
R12 "10K / 0.1W / 1% / SMD 0603" LFP020__CR1608-0603-IPC7351_B 161.7,30.3 r270 top
R13_M1 "1.78K / 0.1W / 1% / 50V / SMD 0603" LFP020__CR1608-0603-IPC7351_B 79.89,147.99 r180 top (schematic designator R13)
R13_M2 "1.78K / 0.1W / 1% / 50V / SMD 0603" LFP020__CR1608-0603-IPC7351_B 104.25,148.1 r180 top (schematic designator R13)
R13_M3 "1.78K / 0.1W / 1% / 50V / SMD 0603" LFP020__CR1608-0603-IPC7351_B 139.95,147.9 r180 top (schematic designator R13)
R13_M4 "1.78K / 0.1W / 1% / 50V / SMD 0603" LFP020__CR1608-0603-IPC7351_B 166.99,147.69 r180 top (schematic designator R13)
R14_M1 "3.3K / 0.1W / 1% / SMD 0603" LFP020__CR1608-0603-IPC7351_B 82.69,148.79 r270 top (schematic designator R14)
R14_M2 "3.3K / 0.1W / 1% / SMD 0603" LFP020__CR1608-0603-IPC7351_B 107.05,148.9 r270 top (schematic designator R14)
R14_M3 "3.3K / 0.1W / 1% / SMD 0603" LFP020__CR1608-0603-IPC7351_B 142.75,148.7 r270 top (schematic designator R14)
R14_M4 "3.3K / 0.1W / 1% / SMD 0603" LFP020__CR1608-0603-IPC7351_B 169.79,148.49 r270 top (schematic designator R14)
R15 "4.7K / 0.1W / 1% / SMD 0603" LFP020__CR1608-0603-IPC7351_B 122.7,105.6 r0 top
R16 "4.7K / 0.1W / 1% / SMD 0603" LFP020__CR1608-0603-IPC7351_B 109.4,107.6 r180 top
R17_L1 "2.2K / 0.1W / 1% / SMD 0603" LFP020__CR1608-0603-IPC7351_B 214.7,130.1 r270 top (schematic designator R17)
R17_L2 "2.2K / 0.1W / 1% / SMD 0603" LFP020__CR1608-0603-IPC7351_B 214.7,104.3 r270 top (schematic designator R17)
R17_L3 "2.2K / 0.1W / 1% / SMD 0603" LFP020__CR1608-0603-IPC7351_B 214.6,67 r270 top (schematic designator R17)
R17_L4 "2.2K / 0.1W / 1% / SMD 0603" LFP020__CR1608-0603-IPC7351_B 214.61,41.38 r270 top (schematic designator R17)
R17_L5 "2.2K / 0.1W / 1% / SMD 0603" LFP020__CR1608-0603-IPC7351_B 187.7,130.1 r270 top (schematic designator R17)
R17_L6 "2.2K / 0.1W / 1% / SMD 0603" LFP020__CR1608-0603-IPC7351_B 187.8,104.3 r270 top (schematic designator R17)
R17_L7 "2.2K / 0.1W / 1% / SMD 0603" LFP020__CR1608-0603-IPC7351_B 187.6,67 r270 top (schematic designator R17)
R17_L8 "2.2K / 0.1W / 1% / SMD 0603" LFP020__CR1608-0603-IPC7351_B 187.61,41.38 r270 top (schematic designator R17)
RLY1_L1 "TQ2-24" TQ2#1 223.6,135.5 r270 top (schematic designator RLY1)
RLY1_L2 "TQ2-24" TQ2#2 223.6,109.7 r270 top (schematic designator RLY1)
RLY1_L3 "TQ2-24" TQ2#2 223.5,72.4 r270 top (schematic designator RLY1)
RLY1_L4 "TQ2-24" TQ2#2 223.51,46.78 r270 top (schematic designator RLY1)
RLY1_L5 "TQ2-24" TQ2#2 196.6,135.5 r270 top (schematic designator RLY1)
RLY1_L6 "TQ2-24" TQ2#2 196.7,109.7 r270 top (schematic designator RLY1)
RLY1_L7 "TQ2-24" TQ2#2 196.5,72.4 r270 top (schematic designator RLY1)
RLY1_L8 "TQ2-24" TQ2#2 196.51,46.78 r270 top (schematic designator RLY1)
RLY2 "TQ2-24" TQ2#3 164.7,75 r270 top
RLY3 "TQ2-24" TQ2#3 146.6,74.9 r270 top
SN1 "PCB_SNAPOUT" SNAPOUT_NEW 240.348,83.195 r90 top
SN2 "PCB_SNAPOUT" SNAPOUT_NEW 191.2,3.348 r180 top
SN3 "PCB_SNAPOUT" SNAPOUT_NEW 196.7,172.348 r180 top
SN4 "PCB_SNAPOUT" SNAPOUT_NEW 71.2,3.348 r180 top
SN5 "PCB_SNAPOUT" SNAPOUT_NEW -3,94.4 r90 top
SN6 "PCB_SNAPOUT" SNAPOUT_NEW 69.4,172.348 r180 top
TOOLHOLE1_1 "Comment" TOOL-1#1 -7,175.695 r0 top
TOOLHOLE1_1_1 "Comment" TOOL-1#1 -7,0 r0 top
TOOLHOLE5_1 "Comment" TOOL-1#2 244.348,175.695 r0 top
TOOLHOLE5_1_1 "Comment" TOOL-1#2 244.348,0 r0 top
TP1 "SMD_TP" SMD-TP 52.5,77.4 r0 top
TP2 "SMD_TP" SMD-TP 46.6,82 r0 top
TP3 "SMD_TP" SMD-TP 49.8,75 r0 top
TP4 "SMD_TP" SMD-TP 50,77.4 r0 top
TP5 "SMD_TP" SMD-TP 93.6,42.4 r0 top
TP6 "SMD_TP" SMD-TP 69.4,67.9 r0 top
TP7 "SMD_TP" SMD-TP 79.6,52.2 r0 top
TP8 "SMD_TP" SMD-TP 66.2,65.1 r0 top
TP9 "SMD_TP" SMD-TP 144,42.3 r0 top
TP10 "SMD_TP" SMD-TP 165.4,59.8 r0 top
TP11 "SMD_TP" SMD-TP 110.1,52.6 r0 top
TP12 "SMD_TP" SMD-TP 123.8,69 r0 top
TP13_M1 "SMD_TP" SMD-TP 51.1,149.8 r90 top (schematic designator TP13)
TP13_M2 "SMD_TP" SMD-TP 51.2,145.8 r90 top (schematic designator TP13)
TP13_M3 "SMD_TP" SMD-TP 111,141.8 r90 top (schematic designator TP13)
TP13_M4 "SMD_TP" SMD-TP 145.7,139.2 r90 top (schematic designator TP13)
TP14 "SMD_TP" SMD-TP 12.1,42.6 r0 top
TP15 "SMD_TP" SMD-TP 12.2,40.2 r0 top
TP16 "SMD_TP" SMD-TP 50.7,97.5 r0 top
TP17 "SMD_TP" SMD-TP 43.8,99.5 r0 top
TP18 "SMD_TP" SMD-TP 44.4,89 r0 top
TP19 "SMD_TP" SMD-TP 43.3,85.8 r0 top

## Footprints (in the part's own frame and the unit in brackets; to place one, negate y for a bottom-side part, rotate by r counter-clockwise, add the part's x,y. Pads: shape width x height; smd on the part's side, far side on the other; paste and mask are expansions set on the pad)
640456-8 [mm] "Connector, Male Header, 8 Way"
  rect 1.905x1.905 hole 1.02: 1(-8.89,0)
  oct 1.905x1.905 hole 1.02: 2(-6.35,0) 3(-3.81,0) 4(-1.27,0) 5(1.27,0) 6(3.81,0) 7(6.35,0) 8(8.89,0)
  silkscreen extent -10.15,-3.04 10.17,3.1
CR2012-0805-LED [mm]
  rect 1.3x1.5 smd: A(0.95,0) K(-0.95,0)
  silkscreen extent -2.01,-1.14 1.63,1.14
DIP-P16/X1.5 [mm] "16Pin DIP"
  rect 1.5x1.5 hole 0.9: 1(-8.89,-3.81)
  round 1.5 hole 0.9: 2(-6.35,-3.81) 3(-3.81,-3.81) 4(-1.27,-3.81) 5(1.27,-3.81) 6(3.81,-3.81) 7(6.35,-3.81) 8(8.89,-3.81) 9(8.89,3.81) 10(6.35,3.81) 11(3.81,3.81) 12(1.27,3.81) 13(-1.27,3.81) 14(-3.81,3.81) 15(-6.35,3.81) 16(-8.89,3.81)
  silkscreen extent -9.85,-2.65 9.85,2.65
FIDTOP [mil]
  round 40 smd mask+39.37: 1(0,0)
LFP010__CC2012-0805-IPC7351_B [mm]
  rrect25% 0.9x1.3 smd paste-0.01: 1(-0.95,0) 2(0.95,0)
  silkscreen extent -0.3,-0.8 0.3,0.8
LFP011__CC1608-0603-IPC7351_B [mm]
  rrect25% 0.8x0.8 smd: 1(-0.75,0) 2(0.75,0)
  silkscreen extent -0.2,-0.55 0.2,0.55
LFP014__QFN65P500X500X80_HS-21N [mm] "QFN, 20-Leads, Body 5.00x5.00mm, Pitch 0.65mm, Thermal Pad 3.25x3.25mm, IPC Medium Density"
  rrect25% 0.3x1.05 smd paste-0.03: 1(-1.3,-2.475) 2(-0.65,-2.475) 3(0,-2.475) 4(0.65,-2.475) 5(1.3,-2.475) 11(1.3,2.475) 12(0.65,2.475) 13(0,2.475) 14(-0.65,2.475) 15(-1.3,2.475)
  rrect25% 1.05x0.3 smd paste-0.03: 6(2.475,-1.3) 7(2.475,-0.65) 8(2.475,0) 9(2.475,0.65) 10(2.475,1.3) 16(-2.475,1.3) 17(-2.475,0.65) 18(-2.475,0) 19(-2.475,-0.65) 20(-2.475,-1.3)
  rect 3.25x3.25 smd paste-3: PAD(0,0)
  silkscreen extent -2.7,-2.7 2.7,2.7
LFP020__CR1608-0603-IPC7351_B [mm]
  rrect25% 0.8x0.8 smd: 1(-0.75,0) 2(0.75,0)
  silkscreen extent -0.2,-0.5 0.2,0.5
LFP021__SOT23 [mm] "SOT-23; 3 Leads; Body 3.0 x 2.5 mm, inc. leads (LxW max)"
  rrect25% 0.85x1 smd paste-0.05: 1(-0.95,-1.2) 2(0.95,-1.2) 3(0,1.2)
  silkscreen extent -1.27,-0.3 1.28,1.2
LFP049__TSSOP-16 [mm] "Copied from 984E-02"
  rrect25% 0.3x1.65 smd paste-0.03: 1(-2.275,-2.775) 2(-1.625,-2.775) 3(-0.975,-2.775) 4(-0.325,-2.775) 5(0.325,-2.775) 6(0.975,-2.775) 7(1.625,-2.775) 8(2.275,-2.775) 9(2.275,2.775) 10(1.625,2.775) 11(0.975,2.775) 12(0.325,2.775) 13(-0.325,2.775) 14(-0.975,2.775) 15(-1.625,2.775) 16(-2.275,2.775)
  silkscreen extent -2.65,-1.55 2.45,1.55
LFP068__SO-G16/G6.9 [mm] "16Pin SO"
  rrect25% 0.6x2.25 smd paste-0.05: 1(-4.445,-4.575) 2(-3.175,-4.575) 3(-1.905,-4.575) 4(-0.635,-4.575) 5(0.635,-4.575) 6(1.905,-4.575) 7(3.175,-4.575) 8(4.445,-4.575) 9(4.445,4.575) 10(3.175,4.575) 11(1.905,4.575) 12(0.635,4.575) 13(-0.635,4.575) 14(-1.905,4.575) 15(-3.175,4.575) 16(-4.445,4.575)
  silkscreen extent -5.27,-3.05 5.27,3.05
LFP079__SOP16 [mm]
  rrect10% 0.6x1.55 smd paste-0.05: 1(-4.445,-2.7) 2(-3.175,-2.7) 3(-1.905,-2.7) 4(-0.635,-2.7) 5(0.635,-2.7) 6(1.905,-2.7) 7(3.175,-2.7) 8(4.445,-2.7) 9(4.445,2.7) 10(3.175,2.7) 11(1.905,2.7) 12(0.635,2.7) 13(-0.635,2.7) 14(-1.905,2.7) 15(-3.175,2.7) 16(-4.445,2.7)
  silkscreen extent -5.08,-1.16 5.08,1.16
LFP097__SOIC150-8 [mm] "Small Outline, Plastic, Narrow; 8 Leads; Body Width 3.8 mm; Pitch 1.27 mm"
  rrect10% 0.6x1.7 smd paste-0.05: 1(-1.905,-2.85) 2(-0.635,-2.85) 3(0.635,-2.85) 4(1.905,-2.85) 5(1.905,2.85) 6(0.635,2.85) 7(-0.635,2.85) 8(-1.905,2.85)
  silkscreen extent -2.5,-1.6 2.5,1.6
LFP140__QFN8 [mm]
  rrect10% 1.1x0.6 smd: 1(-1.1,1.875) 2(-1.1,0.625) 3(-1.1,-0.625) 4(-1.1,-1.875) 5(1.1,-1.875) 6(1.1,-0.625) 7(1.1,0.625) 8(1.1,1.875)
  silkscreen extent -1.95,-2.5 1.5,2.72
RLOOP_LOGO [mm]
  silkscreen extent 0.89,0.39 8.82,4.45
RLOOP_NODE_CORE [mil]
  oct 59.06x75 hole 42: A10(200,0) A11(200,100) A12(300,0) A13(300,100) A14(400,0) AGND(400,100) ID1(200,400) ID2(200,500) ID3(300,400) ID4(500,500) ID5(500,400) ID6(400,500) ID7(400,400) ID8(300,500) SCL(700,500) SDA(700,400) T0(900,400) T1(900,500) T2(1000,400) T5(1000,500) T6(1200,400) T7(1200,500) T8(1300,400) T9(1300,500) T10(1400,400) T11(1400,500) T14(1600,400) T15(1600,500) T16(1700,400) T17(1700,500) T20(1800,400) T21(1800,500) T22(1900,400) T23(1900,500) T24(2000,400) T25(2000,500) T26(2100,400) T27(2100,500) T28(1700,0) T31(1700,100) T32(1800,0) T33(1800,100)
  oct 75x75 hole 42: D3V31(1300,0) D3V32(1300,100) D12V1(0,300) D12V2(0,200) GND1(2100,100) GND2(2100,0) GND3(900,100) GND4(900,0) P5V1(0,0) P5V2(0,100) P24V1(0,400) P24V2(0,500) T12(1500,0) T13(1500,100)
  silkscreen extent -100,-50 2160,550
SMD-TP [mm]
  rect 1.6x1.6 smd paste-2: 1(0,0)
  silkscreen extent -0.9,-0.9 0.9,0.9
SNAPOUT_NEW [mm]
  round 0.4 hole 0.8 unplated: 0(0,0) 0(1.2,0) 0(2.4,0) 0(3.6,0)
STATIC_LABEL [mm]
  silkscreen extent -6.16,-3.95 6.18,7.02
TOOL-1#1 [mm]
  round 2.54 hole 3 unplated: TOOL(0,0)
TOOL-1#2 [mm]
  round 0.076 hole 3 slot 4 at 0 deg unplated: TOOL1(0,0)
TQ2#1 [mm]
  rect 1.8x1.8 hole 0.9: 1(-5.08,-3.81)
  round 1.8 hole 0.9: 2(-2.54,-3.81) 3(0,-3.81) 4(2.54,-3.81) 5(5.08,-3.81) 6(5.08,3.81) 9(-2.54,3.81) 10(-5.08,3.81)
  oval 1.2x1.8 hole 0.9: 7(2.54,3.81) 8(0,3.81)
  silkscreen extent -7,-4.5 7,4.5
TQ2#2 [mm]
  rect 1.8x1.8 hole 0.9: 1(-5.08,-3.81)
  round 1.8 hole 0.9: 2(-2.54,-3.81) 3(0,-3.81) 4(2.54,-3.81) 5(5.08,-3.81) 6(5.08,3.81) 9(-2.54,3.81) 10(-5.08,3.81)
  oval 1.4x1.8 hole 0.9: 7(2.54,3.81) 8(0,3.81)
  silkscreen extent -7,-4.5 7,4.5
TQ2#3 [mm]
  rect 1.8x1.8 hole 0.9: 1(-5.08,-3.81)
  round 1.8 hole 0.9: 2(-2.54,-3.81) 3(0,-3.81) 4(2.54,-3.81) 5(5.08,-3.81) 6(5.08,3.81) 7(2.54,3.81) 8(0,3.81) 9(-2.54,3.81) 10(-5.08,3.81)
  silkscreen extent -7,-4.5 7,4.5

## Part data
C1 C2 C3 C4: "Capacitor, Ceramic Chip, 100nF, 50V, 10%, SMD 0603"
C5 C6 C7 C8 C9 C10 C11 C12 C13 C14 C15 C16 C17 C18 C19 C20 C22_M1 C22_M2 C22_M3 C22_M4 C24 C25 C26 C27 C28 C29 C30 C31 C32: "Capacitor, Ceramic Chip, 100nF (0.1uF), 50V, 5%, SMD 0603 [LCA016]"
C21_M1 C21_M2 C21_M3 C21_M4: "Capacitor, Ceramic Chip, 10pF, 50V, 5%, SMD 0603 [LCA019]"
C23_M1 C23_M2 C23_M3 C23_M4: "Capacitor, Ceramic Chip, 1uF, 50V, SMD 0805 [LCA098]"
CN1 CN3 CN4 CN5 CN6 CN7_L1 CN7_L2 CN7_L3 CN7_L4 CN7_L5 CN7_L6 CN7_L7 CN7_L8 CN8 CN9 CN10 CN11 CN12 CN13: "Connector, Male Header, 8 Way"
CN2: "rLoop Node Core Connector"
D1_L1 D1_L2 D1_L3 D1_L4 D1_L5 D1_L6 D1_L7 D1_L8 D2 D3 D4 D5 D6 D7: "Diode, Small Signal, 0.2A, 85V, SMD SOT-23 [LIC006]"
IC1: "IC, RS232 Line Driver, 3.3V, SMD TSSOP16"
IC2 IC3 IC4 IC5 IC6 IC7 IC8 IC9: "IC, RS485 Isolator, SMD SOIC 16 [LIC543]"
IC10_L1 IC10_L2 IC10_L3 IC10_L4 IC10_L5 IC10_L6 IC10_L7 IC10_L8 IC13 IC14: "IC, Relay Driver, 28V Industrial, SMD SOT23 [LIC292]"
IC11_M1 IC11_M2 IC11_M3 IC11_M4: "IC, 4-20mA Interface, DIP16 [LIC546]"
IC12_M1 IC12_M2 IC12_M3 IC12_M4: "Diode, Zener, 3.6V, 0.225W, SMD [LIC083]"
IC15 IC17: "IC, Mux 25V, SMD QFN20 [LIC544]"
IC16: "IC, Dual 2-4 Demux, SMD SOIC-16"
IC18: "IC, I2C Line Driver [LIC571]"
IC19: "IC, Pressure Sensor IC, SMD QFN8 [LIC524]"
IC20_L1 IC20_L2 IC20_L3 IC20_L4 IC20_L5 IC20_L6 IC20_L7 IC20_L8: "LED, SMD, 0805 Green [LIC016]"
R1 R2 R3 R4: "Resistor, Ceramic Chip, 0R, 0.1W, SMD 0603 [LRE026]"
R5 R6 R7 R8 R9 R10 R11 R12: "Resistor, Ceramic Chip, 10K, 0.1W, 1%, SMD 0603 [LRE030]"
R13_M1 R13_M2 R13_M3 R13_M4: "Resistor, Ceramic Chip, 1.78K, 0.1W, 1%, SMD 0603 [LRE167]"
R14_M1 R14_M2 R14_M3 R14_M4: "Resistor, Ceramic Chip, 3.3K0, 0.1W, 1%, SMD 0603 [LRE140]"
R15 R16: "Resistor, Ceramic Chip, 4K7, 0.1W, 1%, SMD 0603 [LRE058]"
R17_L1 R17_L2 R17_L3 R17_L4 R17_L5 R17_L6 R17_L7 R17_L8: "Resistor, Ceramic Chip, 2.2K, 0.1W, 1%, SMD 0603 [LRE027]"
RLY1_L1 RLY1_L2 RLY1_L3 RLY1_L4 RLY1_L5 RLY1_L6 RLY1_L7 RLY1_L8 RLY2 RLY3: "Relay, DPDT, Non Latching, 24VDC Coil, 1A Rating, PTH"
TP1 TP2 TP3 TP4 TP5 TP6 TP7 TP8 TP9 TP10 TP11 TP12 TP13_M1 TP13_M2 TP13_M3 TP13_M4 TP14 TP15 TP16 TP17 TP18 TP19: "SMD Test Point"

## Free pads (board coordinates)
  round 4 hole 3.2: B(26,88) B(58.5,28.8) B(58.5,146.9) B(118.5,28.8) B(118.5,146.9) B(178.5,28.8) B(178.5,146.9) B(210.5,28.8) B(210.7,146.8) B(211,87.8)

## Via types
v1: diameter 1.2, hole 0.6, Top Layer to Bottom Layer, 181 vias
v2: diameter 0.5, hole 0.2, Top Layer to Bottom Layer, tented both sides, 16 vias
v3: diameter 1.27, hole 0.711, Top Layer to Bottom Layer, 8 vias

## Nets (pads, with @x,y where several pads share a name; then routed paths per layer and width w, separated by ;. In a path a pad name is that pad's centre, name@x,y a point inside that pad or via, vN(x,y) a via of type N, cw(c..) or ccw(c..) an arc to the next point about the centre after c; other vN are vias at no path point)
AGND: C21_M1.2 C21_M2.2 C21_M3.2 C21_M4.2 C22_M1.2 C22_M2.2 C22_M3.2 C22_M4.2 C23_M1.2 C23_M2.2 C23_M3.2 C23_M4.2 CN2.AGND CN8.5 CN8.6 CN8.7 CN8.8 CN9.5 CN9.6 CN9.7 CN9.8 IC11_M1.2 IC11_M1.4 IC11_M1.5 IC11_M1.13 IC11_M2.2 IC11_M2.4 IC11_M2.5 IC11_M2.13 IC11_M3.2 IC11_M3.4 IC11_M3.5 IC11_M3.13 IC11_M4.2 IC11_M4.4 IC11_M4.5 IC11_M4.13 IC12_M1.1 IC12_M2.1 IC12_M3.1 IC12_M4.1 R14_M1.1 R14_M2.1 R14_M3.1 R14_M4.1 | length 160.2
  Top Layer w0.254: IC11_M1.13@75.4,145.46 76.32,145.46 76.59,145.19 76.59,144.09 76.79,143.89 77.69,143.89 ; C21_M1.2@77.99,144.74 77.99,144.19 ; IC12_M1.1@79.64,143.89 78.29,143.89 ; C22_M1.2@81.04,151.19 81.04,152.09 ; C23_M1.2@81.04,153.09 81.04,152.09 ; R14_M1.1@82.69,149.54 82.69,151.79 82.39,152.09 81.04,152.09 ; IC11_M2.13@99.76,145.57 100.68,145.57 100.95,145.3 100.95,144.2 101.15,144 102.05,144 ; C21_M2.2@102.35,144.85 102.35,144.3 ; IC12_M2.1@104,144 102.65,144 ; C22_M2.2@105.4,151.3 105.4,152.2 ; C23_M2.2@105.4,153.2 105.4,152.2 ; R14_M2.1@107.05,149.65 107.05,151.9 106.75,152.2 105.4,152.2 ; IC11_M3.13@135.46,145.37 136.38,145.37 136.65,145.1 136.65,144 136.85,143.8 137.75,143.8 ; C21_M3.2@138.05,144.65 138.05,144.1 ; IC12_M3.1@139.7,143.8 138.35,143.8 ; C22_M3.2@141.1,151.1 141.1,152 ; C23_M3.2@141.1,153 141.1,152 ; R14_M3.1@142.75,149.45 142.75,151.7 142.45,152 141.1,152 ; IC11_M4.13@162.5,145.16 163.42,145.16 163.69,144.89 163.69,143.79 163.89,143.59 164.79,143.59 ; C21_M4.2@165.09,144.44 165.09,143.89 ; IC12_M4.1@166.74,143.59 165.39,143.59 ; C22_M4.2@168.14,150.89 168.14,151.79 ; C23_M4.2@168.14,152.79 168.14,151.79 ; R14_M4.1@169.79,149.24 169.79,151.49 169.49,151.79 168.14,151.79 ; 77.69,143.89 77.99,144.19 ; 77.69,143.89 78.09,143.89 ; 77.99,144.19 77.99,143.99 78.09,143.89 ; 77.99,144.19 78.29,143.89 ; 78.09,143.89 78.29,143.89 ; 102.05,144 102.45,144 ; 102.05,144 102.35,144.3 ; 102.35,144.3 102.65,144 ; 102.35,144.3 102.35,144.1 102.45,144 ; 102.45,144 102.65,144 ; 137.75,143.8 138.05,144.1 ; 137.75,143.8 138.15,143.8 ; 138.05,144.1 138.05,143.9 138.15,143.8 ; 138.05,144.1 138.35,143.8 ; 138.15,143.8 138.35,143.8 ; 164.79,143.59 165.19,143.59 ; 164.79,143.59 165.09,143.89 ; 165.09,143.89 165.39,143.59 ; 165.09,143.89 165.09,143.69 165.19,143.59 ; 165.19,143.59 165.39,143.59
  Top Layer w1: CN2.AGND@5.54,111.84 7.74,111.84 8.7,112.8 8.7,117.8 6.7,119.8 0.8,119.8 -0.1,120.7 -0.1,140.8 1.6,142.5 60.5,142.5 60.92,142.92 IC11_M1.5@67.78,142.92
  other v1: 169.59,151.69 142.55,151.9 82.49,151.99 106.85,152.1
CHARGER_CTRL_RX: CN2.T23 IC1.9 | length 215.7
  Top Layer w0.3: v1(9.2,102.5) 9.6,102.9 17.5,102.9 18,103.4 33.7,103.4 34.6,104.3 34.6,114.5 35.1,115 100.6,115 101.3,114.3 101.3,100 102.4,98.9 128.3,98.9 130,100.6 130,105.9 130.575,106.475 IC1.9@158.225,106.475
  Mid-Layer 1 w0.3: v1(9.2,102.5) 10.6,102.5 10.9,102.2 10.9,75.6 11.5,75 14.8,75 15.7,74.1 CN2.T23@15.7,73.74
CHARGER_CTRL_TX: CN2.T22 IC1.10 | length 212.5
  Top Layer w0.3: v1(9.3,97.6) 9.3,100.7 10.9,102.3 35,102.3 35.7,103 35.7,113.7 36.3,114.3 99.8,114.3 100.6,113.5 100.6,99.1 101.4,98.3 129.3,98.3 130.6,99.6 130.6,105.3 131.125,105.825 IC1.10@158.225,105.825
  Mid-Layer 1 w0.3: v1@9.1,97.8 9.7,97.2 9.7,76.911 10.2,76.411 10.2,74.4 10.86,73.74 CN2.T22@13.16,73.74
CHARGER_RS232_RX: CN2.T7 IC1.12 | length 193
  Top Layer w0.3: CN2.T7@15.7,91.52 15.7,93.1 15.1,93.7 11.9,93.7 11.5,94.1 11.5,100.2 12.2,100.9 18.3,100.9 18.9,100.3 19.1,100.3 36.1,100.3 37.4,101.6 37.4,112 38.4,113 98.3,113 99.1,112.2 99.1,97.6 99.8,96.9 131.2,96.9 131.9,97.6 131.9,103.9 132.525,104.525 IC1.12@158.225,104.525
CHARGER_RS232_TX: CN2.T8 IC1.11 | length 194.6
  Top Layer w0.3: CN2.T8@13.16,88.98 11.52,88.98 10.6,89.9 10.6,99.1 10.3,99.4 10.3,100.5 11.5,101.7 18.9,101.7 19.1,101.5 35.5,101.5 36.6,102.6 36.6,112.8 37.4,113.6 99,113.6 99.7,112.9 99.7,98.7 100.8,97.6 130.1,97.6 131.2,98.7 131.2,104.4 131.975,105.175 IC1.11@158.225,105.175
CHG232_RX1: CN1.1 IC1.13 | length 17
  Top Layer w0.3: CN1.1@157.31,117 157.31,110.69 158,110 159.8,110 160.1,109.7 160.1,104.3 159.675,103.875 IC1.13@158.225,103.875
CHG232_RX2: CN1.2 IC1.8 | length 13.4
  Top Layer w0.3: CN1.2@159.85,117 159.85,113.101 161.4,111.551 161.4,106.8 161.725,106.475 IC1.8@163.775,106.475
CHG232_TX1: CN1.3 IC1.14 | length 19.5
  Top Layer w0.3: IC1.14@158.225,103.225 160.025,103.225 160.7,103.9 160.7,111.6 160.4,111.9 v1(159.5,111.9)
  Mid-Layer 1 w0.3: v1(159.5,111.9) 162,111.9 162.39,112.29 CN1.3@162.39,117
CHG232_TX2: CN1.4 IC1.7 | length 12.7
  Top Layer w0.3: IC1.7@163.775,105.825 164.825,105.825 165.5,106.5 165.5,111.9 164.93,112.47 CN1.4@164.93,117